# Altium PCB PCB1.PcbDoc
Units mm, origin at the board's own origin, x right, y up, seen from the top; angles counter-clockwise.
Board outline 29.25 x 28 mm, 4 copper layers (L1 (Signal), L2 (GND), L3 (GND), L4 (Signal)), stack 1.57 mm thick; 35 components, 27 nets, 166 pads, 98 vias.
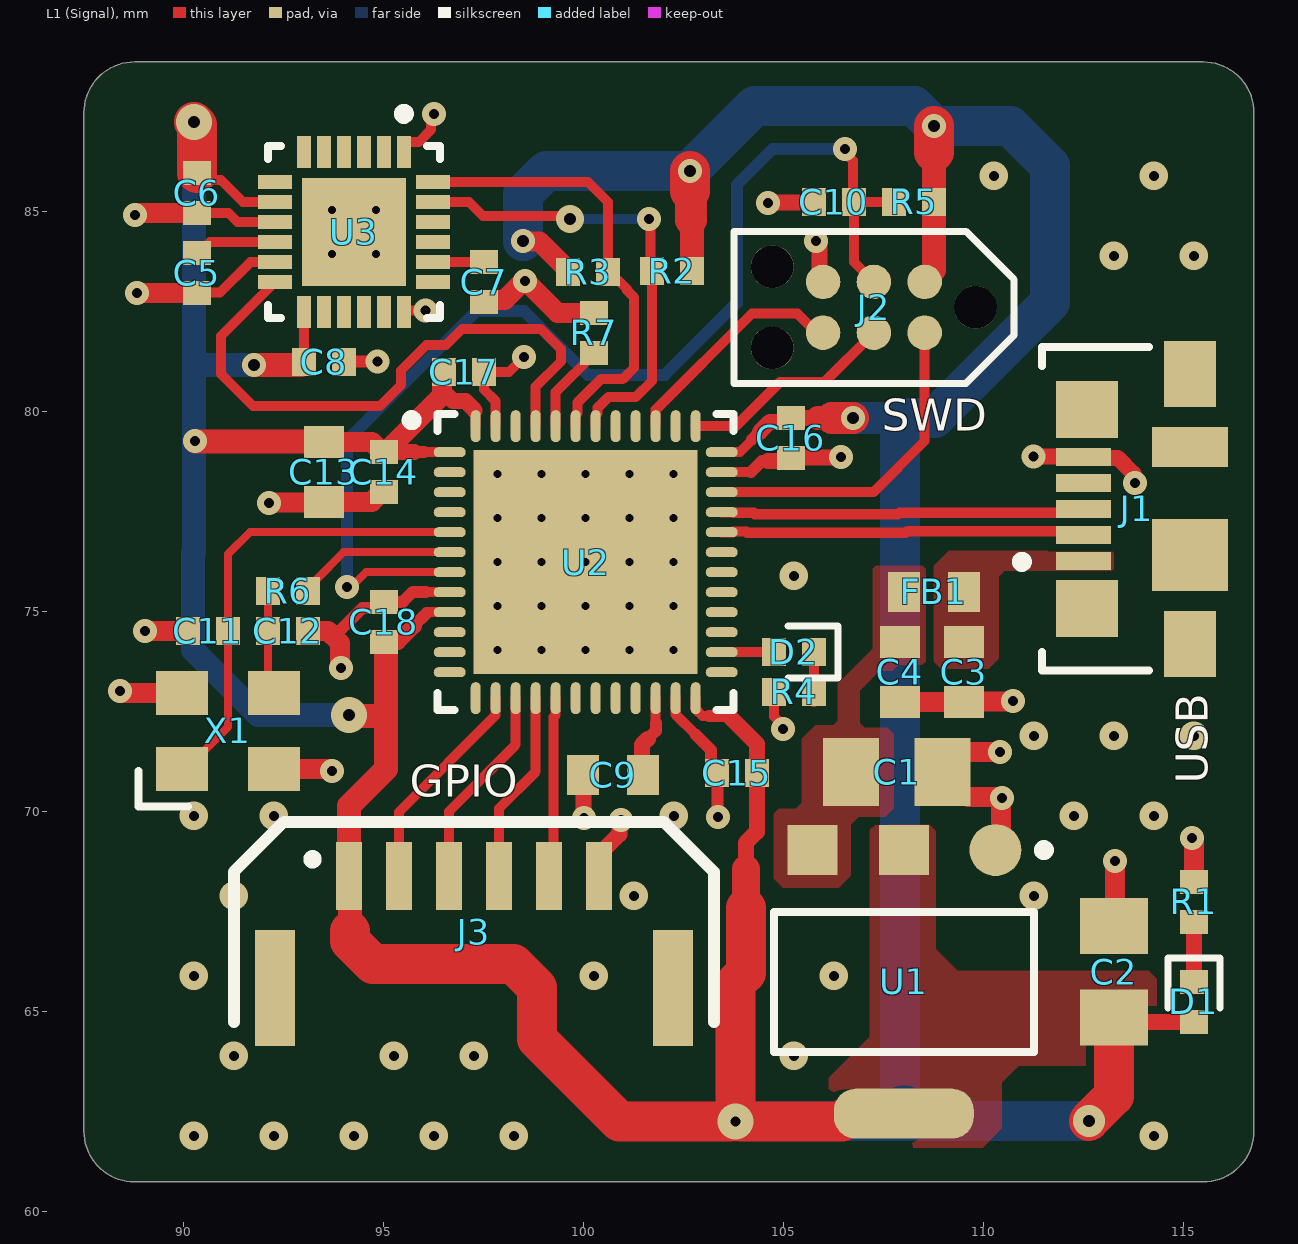
[diagram p0: L1 (Signal) view]
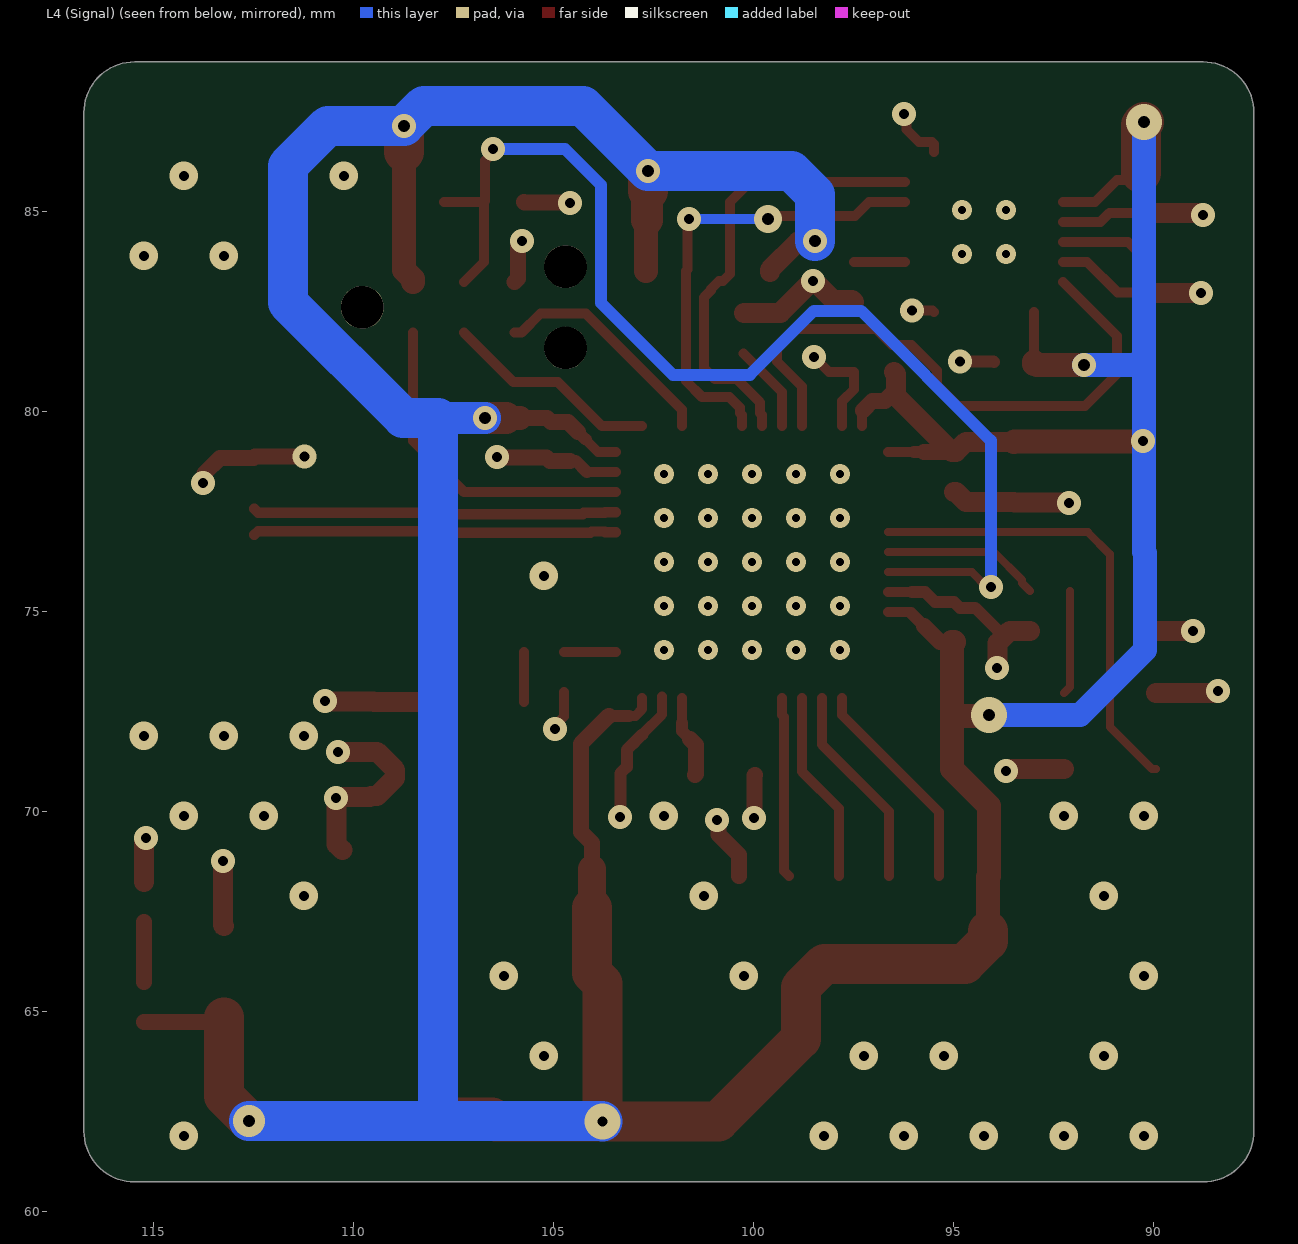
[diagram p1: L4 (Signal) view, seen from below]
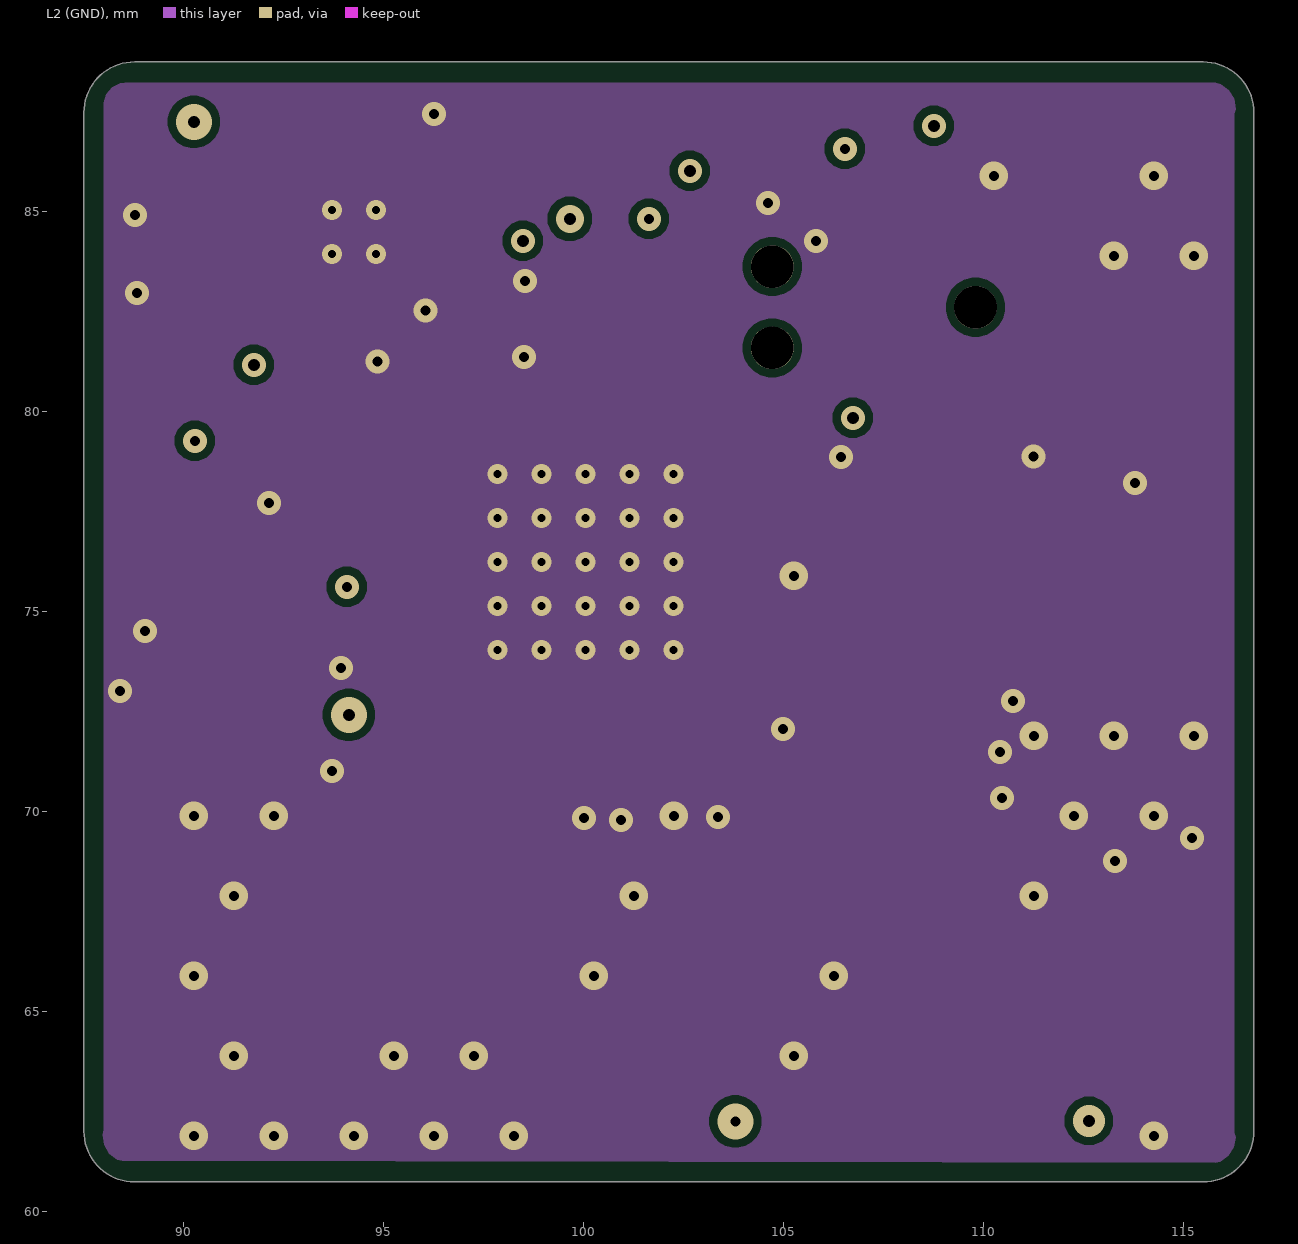
[diagram p2: L2 (GND)]
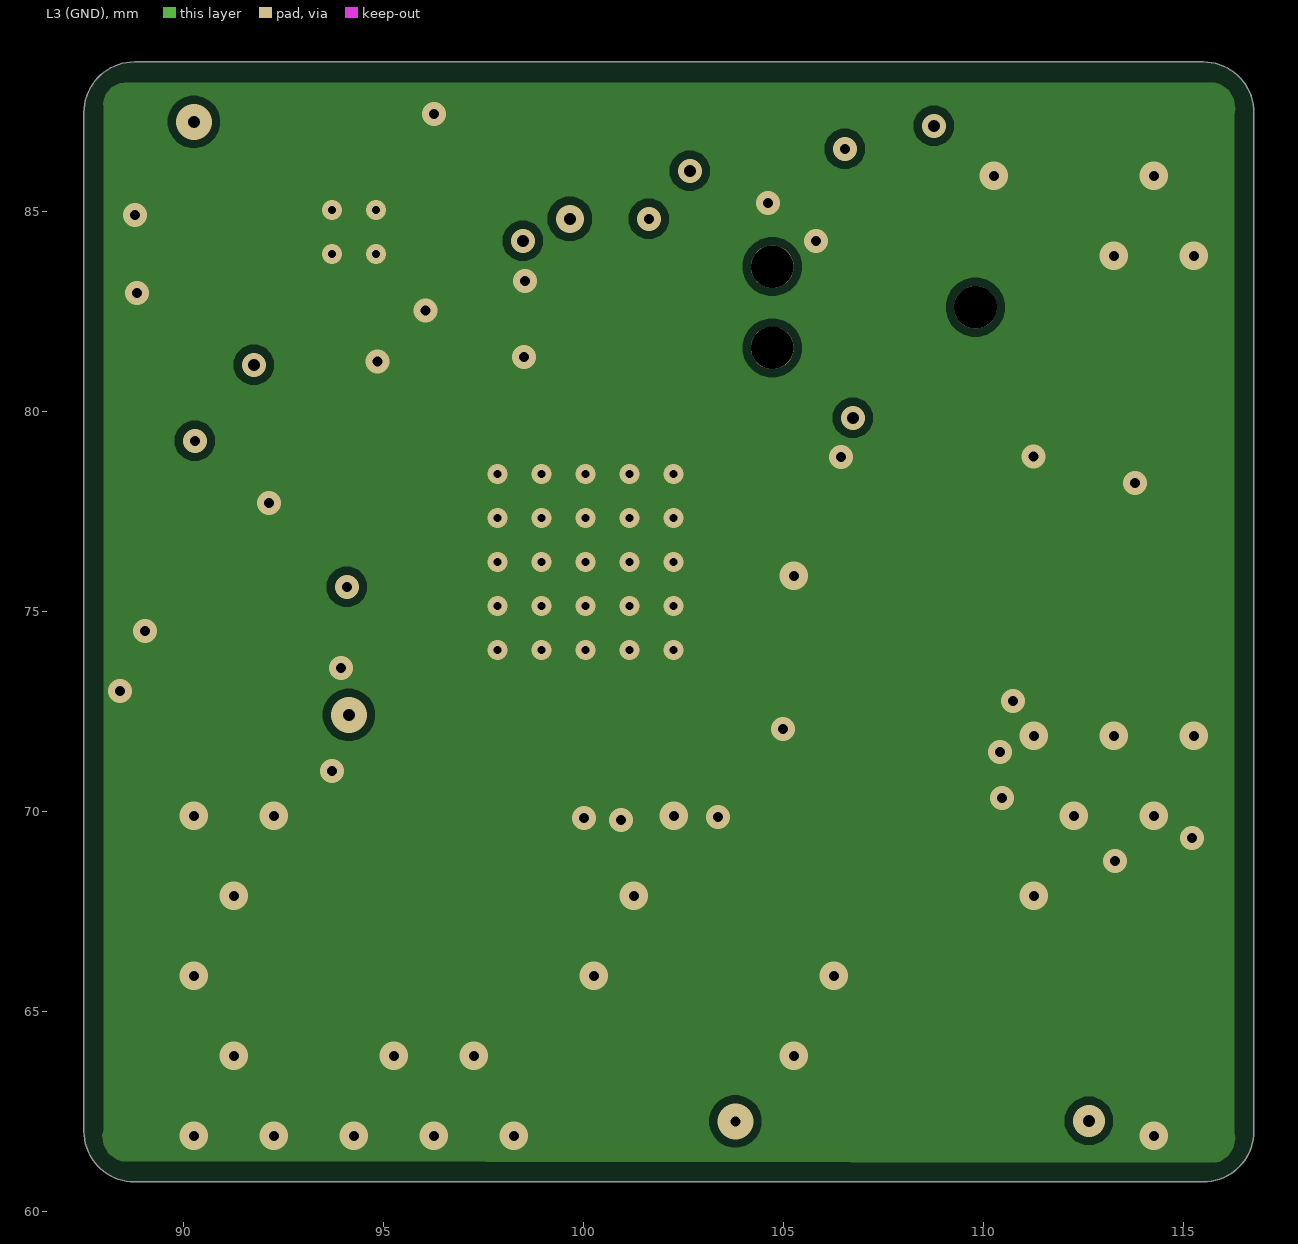
[diagram p3: L3 (GND)]
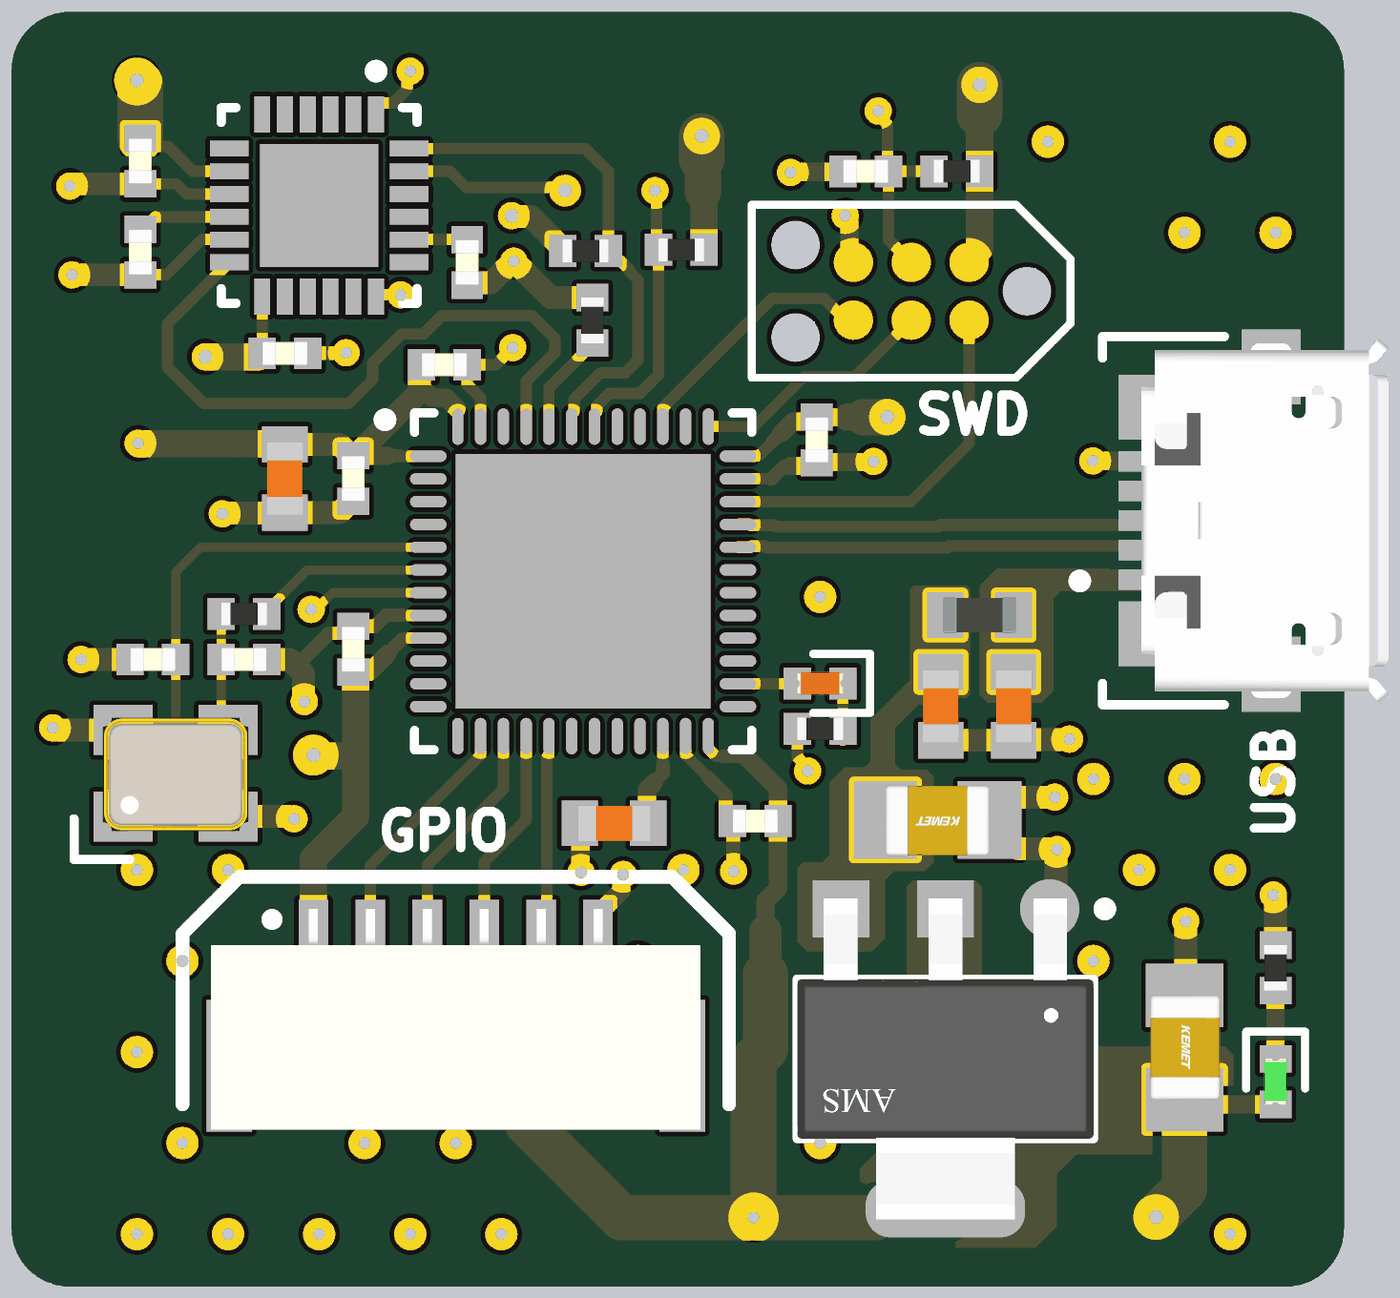
[diagram p4: 3D render of the assembled board from above, using the file's embedded part models]

## Layer stack, top to bottom
Top Solder: solder mask 0.0254, SM-001, Dk 4
L1 (Signal): signal copper 0.035
Dielectric 1: prepreg 0.2, PP-017, Dk 4.6
L2 (GND): signal copper 0.0175
Dielectric 3: core 1.065, Core-039, Dk 4.6
L3 (GND): signal copper 0.0175
Dielectric 5: prepreg 0.2, PP-017, Dk 4.6
L4 (Signal): signal copper 0.035
Bottom Solder: solder mask 0.0254, SM-001, Dk 4

## Board outline
87.5,62.02 ccw(c88.77,62.02) 88.77,60.75 115.48,60.75 ccw(c115.48,62.02) 116.75,62.02 116.75,87.48 ccw(c115.48,87.48) 115.48,88.75 88.77,88.75 ccw(c88.77,87.48) 87.5,87.48

## Design rules (kind name [scope] priority, off if disabled: settings)
Clearance [All] p1: gap=0.2 ignorepadtopadclearanceinfootprint=TRUE
DiffPairsRouting [All] p1: maxlimit=0.254 minlimit=0.203 mostfreqgap=0.254 toplayer_maxgap=0.203 toplayer_prefgap=0.203 toplayer_minwidth=0.26 toplayer_maxwidth=0.26 toplayer_prefwidth=0.26 bottomlayer_maxgap=0.203 bottomlayer_prefgap=0.203 bottomlayer_minwidth=0.26 bottomlayer_maxwidth=0.26 bottomlayer_prefwidth=0.26 impedanceprofiledriven=TRUE impedanceprofileid={C9605FE3-F2DF-4C32-933C-780B4CB2B23F} impedanceprofilevalue=90.000000 maxuncoupledlength=12.7
PolygonConnect [All] p1: connectstyle=Direct reliefconductorwidth=0.254 reliefentries=4 polygonreliefangle="90 Angle" airgapwidth=0.254
RoutingVias [All] p1: holewidth=0.3 width=0.7 viastyle="Through Hole" minholewidth=0.25 minwidth=0.55 maxholewidth=0.4 maxwidth=0.9
SolderMaskExpansion [All] p1: expansion=0.102 istentingtop=FALSE
UnRoutedNet [All] p1: checkbadconnections=TRUE
Width [All] p1: maxlimit=1 minlimit=0.2 preferedwidth=0.3 midlayer1_minwidth=0.254 midlayer1_maxwidth=0.254 midlayer1_prefwidth=0.254 midlayer2_minwidth=0.254 midlayer2_maxwidth=0.254 midlayer2_prefwidth=0.254 minimp=50.000000 maximp=50.000000 favimp=50.000000
28 further rules are at their usual default settings.

## Classes and differential pairs
net class DIFF_USB: USB_D_N USB_D_P
differential pair USB_D: +USB_D_P -USB_D_N

## Components (designator, comment, footprint, x,y, rotation, side; value= is the part's Value field where it differs from the comment)
C1 "22u" CAP_0805 107.825,71 r180 top
C2 "22u" CAP_0805 113.25,66 r270 top
C3 "2.2uF" CAP_0603 109.5,73.5 r90 top
C4 "2.2uF" CAP_0603 107.9,73.5 r90 top
C5 "100nF" CAP_0402 90.325,83.475 r90 top
C6 "10nF" CAP_0402 90.325,85.475 r90 top
C7 "2n2" CAP_0402 97.5,83.25 r90 top
C8 "100nF" CAP_0402 93.5,81.25 r180 top
C9 "2n2" CAP_0603 100.725,70.925 r0 top
C10 "100nF" CAP_0402 106.25,85.25 r0 top
C11 "10pF" CAP_0402 90.6,74.525 r0 top
C12 "10pF" CAP_0402 92.6,74.525 r180 top
C13 "2.2uF" CAP_0603 93.5,78.5 r90 top
C14 "100nF" CAP_0402 95,78.5 r90 top
C15 "100nF" CAP_0402 103.825,70.975 r0 top
C16 "100nF" CAP_0402 105.175,79.35 r90 top
C17 "100nF" CAP_0402 97,81 r180 top
C18 "100nF" CAP_0402 95,74.75 r270 top
D1 "GREEN" LED_0402_GREEN 115.25,65.25 r90 top
D2 "RED" LED_0402_RED 105.25,74 r0 top
FB1 "120R" FB_0603 108.75,75.5 r180 top
J1 "473460001" FP-473460001-MFG 114.8,77.575 r90 top
J2 "TC2030-NL" TC2030-NL-FP 107.25,82.615 r180 top
J3 "SM06B-GHS-TB" SM06B-GHS-TB 97.25,67 r0 top
R1 "1k" RES_0402 115.25,67.75 r270 top
R2 "2k2" RES_0402 102.2,83.525 r0 top
R3 "2k2" RES_0402 100.1,83.5 r180 top
R4 "1k" RES_0402 105.25,73 r0 top
R5 "10K" RES_0402 108.25,85.25 r0 top
R6 "0R" RES_0402 92.6,75.525 r0 top
R7 "10K" RES_0402 100.25,81.975 r270 top
U1 "AMS1117-3.3" FP-AMS1117-IPC_C 108,65.75 r270 top
U2 "STM32F411CEU6" STM-UFQFPN48_L 100.046,76.242 r0 top
U3 "MPU-6050" IS-QFN-24_V 94.25,84.5 r270 top
X1 "24MHz" XTAL_3225 91.1,72.025 r0 top

## Footprints (in the part's own frame and the unit in brackets; to place one, negate y for a bottom-side part, rotate by r counter-clockwise, add the part's x,y. Pads: shape width x height; smd on the part's side, far side on the other; paste and mask are expansions set on the pad)
CAP_0402 [mm]
  rect 0.6x0.7 smd: 1(-0.5,0) 2(0.5,0)
  body extent -0.5,-0.26 0.5,0.26, height 0.37
CAP_0603 [mm]
  rect 0.8x1 smd: 1(-0.75,0) 2(0.75,0)
  body extent -0.8,-0.4 0.8,0.4, height 0.51
CAP_0805 [mm]
  rect 1.4x1.7 smd: 1(-1.143,0) 2(1.143,0)
  body extent -1.15,-0.76 1.15,0.79, height 1.01
FB_0603 [mm]
  rect 0.8x1 smd: 1(-0.75,0) 2(0.75,0)
  body extent -0.8,-0.4 0.8,0.4, height 0.81
FP-473460001-MFG [mm]
  rect 0.45x1.38 smd paste+0 mask+0: 1(-1.3,2.31) 2(-0.65,2.31) 3(0,2.31) 4(0.65,2.31) 5(1.3,2.31)
  rect 1.425x1.55 smd paste+0 mask+0: 6(-2.488,2.225) 7(2.488,2.225)
  rect 1.65x1.3 smd paste+0 mask+0: 8(-3.375,-0.35) 11(3.375,-0.35)
  rect 1.8x1.9 smd paste+0 mask+0: 9(-1.15,-0.35)
  rect 1x1.9 smd paste+0 mask+0: 10(1.55,-0.35)
  silkscreen extent -4.05,0.67 4.05,3.97, body extent -4.3,-2.48 4.3,3.45, height 0.25
FP-AMS1117-IPC_C [mm]
  round 1.3 smd paste+0 mask+0: 1(-3.295,2.29)
  rect 1.25x1.25 smd paste+0 mask+0: 2(-3.295,0) 3(-3.295,-2.29)
  rrect87% 1.25x3.5 smd paste+0 mask+0: 4(3.295,0)
  silkscreen extent -3.42,-3.25 1.75,3.63, body extent -3.9,-3.35 3.9,3.35, height 0.25
IS-QFN-24_V [mm] "QFN, 24-Leads, Body 4x4mm, Pitch 0.5mm, Thermal Pad 2.7x2.6mm"
  rect 0.8x0.35 smd: 1(-2,1.25) 2(-2,0.75) 3(-2,0.25) 4(-2,-0.25) 5(-2,-0.75) 6(-2,-1.25) 13(2,-1.25) 14(2,-0.75) 15(2,-0.25) 16(2,0.25) 17(2,0.75) 18(2,1.25)
  rect 0.35x0.85 smd mask+0.102: 7(-1.25,-1.975) 8(-0.75,-1.975) 9(-0.25,-1.975) 10(0.25,-1.975) 11(0.75,-1.975) 12(1.25,-1.975) 19(1.25,1.975) 20(0.75,1.975) 21(0.25,1.975) 22(-0.25,1.975) 23(-0.75,1.975) 24(-1.25,1.975)
  rect 2.7x2.6 smd: 25(0,0)
  silkscreen extent -3.07,-2.15 2.15,2.15, body extent -2,-2 2,2, height 0.95
LED_0402_GREEN [mm]
  rect 0.6x0.7 smd: A(-0.5,0) K(0.5,0)
  silkscreen extent -0.15,-0.65 1.1,0.65, body extent -0.51,-0.25 0.51,0.25, height 0.45
LED_0402_RED [mm]
  rect 0.6x0.7 smd: A(-0.5,0) K(0.5,0)
  silkscreen extent -0.15,-0.65 1.1,0.65, body extent -0.51,-0.25 0.51,0.25, height 0.45
RES_0402 [mm]
  rect 0.6x0.7 smd: 1(-0.5,0) 2(0.5,0)
  body extent -0.5,-0.25 0.5,0.25, height 0.3
SM06B-GHS-TB [mm]
  rect 0.65x1.7 smd: 1(-3.125,1.4) 2(-1.875,1.4) 3(-0.625,1.4) 4(0.625,1.4) 5(1.875,1.4) 6(3.125,1.4)
  rect 1x2.9 smd: ""(-4.975,-1.4) ""(4.975,-1.4)
  silkscreen extent -6,-2.25 6,2.75, body extent -5.38,-2.8 5.38,2.05, height 4.26
STM-UFQFPN48_L [mm] "QFN, 48-Leads, Body 7.1x7.1mm, Pitch 0.5mm, Thermal Pad 5.6x5.6mm, IPC High Density"
  oval 0.8x0.25 smd: 1(-3.4,2.75) 2(-3.4,2.25) 3(-3.4,1.75) 4(-3.4,1.25) 5(-3.4,0.75) 6(-3.4,0.25) 7(-3.4,-0.25) 8(-3.4,-0.75) 9(-3.4,-1.25) 10(-3.4,-1.75) 11(-3.4,-2.25) 12(-3.4,-2.75) 25(3.4,-2.75) 26(3.4,-2.25) 27(3.4,-1.75) 28(3.4,-1.25) 29(3.4,-0.75) 30(3.4,-0.25) 31(3.4,0.25) 32(3.4,0.75) 33(3.4,1.25) 34(3.4,1.75) 35(3.4,2.25) 36(3.4,2.75)
  oval 0.25x0.8 smd: 13(-2.75,-3.4) 14(-2.25,-3.4) 15(-1.75,-3.4) 16(-1.25,-3.4) 17(-0.75,-3.4) 18(-0.25,-3.4) 19(0.25,-3.4) 20(0.75,-3.4) 21(1.25,-3.4) 22(1.75,-3.4) 23(2.25,-3.4) 24(2.75,-3.4) 37(2.75,3.4) 38(2.25,3.4) 39(1.75,3.4) 40(1.25,3.4) 41(0.75,3.4) 42(0.25,3.4) 43(-0.25,3.4) 44(-0.75,3.4) 45(-1.25,3.4) 46(-1.75,3.4) 47(-2.25,3.4) 48(-2.75,3.4)
  rect 5.6x5.6 smd: 49(0,0)
  silkscreen extent -4.47,-3.7 3.7,3.7, body extent -3.55,-3.55 3.55,3.55, height 0.6
TC2030-NL-FP [mil]
  round 33.98 smd paste-16.99: 1(-50,-25) 2(-50,25) 3(0,-25) 4(0,25) 5(50,-25) 6(50,25)
  round 42.01 hole 42.01 unplated: MH(-100,0) MH(100,-40) MH(100,40)
  silkscreen extent -138,-75 138,75
XTAL_3225 [mm]
  rect 1.3x1.1 smd: 1(-1.15,-0.95) 2(1.15,-0.95) 3(1.15,0.95) 4(-1.15,0.95)
  silkscreen extent -2.23,-1.89 -1,-1, body extent -1.6,-1.28 1.6,1.22, height 0.61

## Part data
C1 C2: library part CAP_0805_16V, "Capacitor SMD 0805 16V"
C3 C4 C9 C13: library part CAP_0603_16V, "Capacitor SMD 0603 16V"
C5 C6 C7 C8 C10 C11 C12 C14 C15 C16 C17 C18: library part CAP_0402_16V, "Capacitor SMD 0402 16V"
D1: library part LED_0402_GREEN, "LED 0402 GREEN SMD"
D2: library part LED_0402_RED, "LED 0402 RED SMD"
FB1: library part FB_0603, "Ferrite Bead SMD 0603"
J1: library part CMP-2000-05246-2, "CONN RCPT USB2.0 MICRO B SMD R/A", Current Rating=1.8A, Manufacturer=Molex, Package=0, Temperature="-30°C to +85°C", Temperature Range High=+85°C, Temperature Range Low=-30°C, Voltage Rating=30V, Automotive=No, Category=Conn, ComponentLink2Description=Datasheet, ComponentLink2URL=https://www.molex.com/webdocs/datasheets/pdf/en-us/0473460001_IO_CONNECTORS.pdf, Conn Orientation="Right Angle", Contact Material=Gold,Nickel, Device Class L1=Connectors, Device Class L2="USB Connectors", Device Class L3=unset, Digikey Description="CONN RCPT USB2.0 MICRO B SMD R/A", Footprint Url=https://www.molex.com/pdm_docs/sd/473460001_sd.pdf, Height=2.945mm, Is Female=yes, Lead Free=Yes, Manufacturer Part Number=473460001, Number Of Contacts=5, Octopart=https://octopart.com/47346-0001-molex-7164928, Pitch=0.65mm, RoHS=TRUE, Shielding=true, Usb Standard="USB 2.0"
J2: "Tag-Connect No-Solder SWD Debug Connector (No Legs) DO NOT PLACE", Manufacturer=Tag-Connect, Manufacturer Part Number=TC2030-NL-FP
J3: "Header Connector 6 Position 1.25MM Pitch SMD Horizontal JST GH", Manufacturer=JST, Manufacturer Part Number=SM06B-GHS-TB
R1 R2 R3 R4 R5 R6 R7: library part RES_0402, "Resistor SMD 0402"
U1: library part CMP-209535-000001-1, "LDO Voltage Regulators 1A, 3.3V", Dropout Voltage=1.1V, Manufacturer="Advanced Monolithic Systems", Max Junction Temp=+125°C, Max Power Dissipation=1.2W, Max Supply Voltage=15V, Nominal Supply Current=5mA, Output Current=1A, Output Voltage=3.3V, Package=AMS1117, Temperature="-40°C to +125°C", Temperature Range Low=-40°C, Automotive=No, Category=IC, ComponentLink2Description=Datasheet, ComponentLink2URL=http://www.advanced-monolithic.com/pdf/ds1117.pdf, Device Class L1="Integrated Circuits (ICs)", Device Class L2="Power Management ICs", Device Class L3="Voltage Regulators - Linear", Height=1.8mm, Ipc Land Pattern Name=SOT229P700X180-4, Lead Free=Yes, Manufacturer Part Number=AMS1117-3.3, Number Of Outputs=1, Octopart=https://octopart.com/ams1117-3.3-advanced+monolithic+systems-25899300, Output Type=Fixed, RoHS=TRUE, Standoff Height=0.64mm, Temperature Range High=+125°C
U2: library part CMP-0243-00165-1, "ARM Cortex-M4 32-bit MCU+FPU, 512 KB Flash, 128 KB RAM, 36 I/Os, 48-Pin UFQFPN, -40 to 85 degC, Tray", I/Os (High Current)=36, Operating Frequency(F) (Processor speed) (MHz)=100, Package Description=UFQFPN48, Package Reference="48-Pin Ultra Thin Fine Pitch Quad Flat No-Lead, 7 x 7 x 0.6 mm Body, 0.5 mm Pitch, Exposed Pad", Supply Voltage(Vcc) min (V)=1.7, ComponentLink1Description="Manufacturer URL", ComponentLink1URL=http://www.st.com/, ComponentLink2Description=Datasheet, ComponentLink2URL=http://www.st.com/st-web-ui/static/active/en/resource/technical/document/datasheet/DM00115249.pdf, Core="ARM Cortex-M4", DatasheetVersion="Rev. 6", FLASH Size (Prog) (kB)=512, Internal RAM Size (kB)=128, Mounting Technology="Surface Mount", Packing=Tray
U3: library part CMP-1753-00002-2, "3-Axis Gyroscope, Accelerometer and a Digital Motion Processor(TM) (DMP), 2.375 to 3.46 V, -40 to 85 degC, 24-Pin QFN, RoHS, Tape and Reel", Manufacturer=InvenSense, Standard Package=5,000, Category=Sensors,Transducers, Datasheet URL=http://datasheet.octopart.com/MPU-6050-InvenSense-datasheet-14421344.pdf, Datasheet Version="Rev. 3.3, 05/2012", Dynamic Catalog=MPU-6000™Series, Family=Multifunction, Featured Product=MPU-60506-Axis,IntegratedI²CSolution, Manufacturer URL=http://www.invensense.com/, Online Catalog=MPU-6000™Series, Other Names="1428-1007-2 / MPU6050", Output Type=Digital, Sensor Type=MotionTracking, Unit PriceUSD=Digital
X1: library part TSX-3225_24.0000MF15X-AC, "Crystal SMD 24MHz 10PPM 7pF 3225", Manufacturer=Epson, Manufacturer Part Number="TSX-3225 24.0000MF15X-AC"

## Via types
v1: diameter 0.711, hole 0.25, L1 (Signal) to L4 (Signal), 29 vias
v2: diameter 0.6, hole 0.25, L1 (Signal) to L4 (Signal), 29 vias
v3: diameter 0.5, hole 0.2, L1 (Signal) to L4 (Signal), 29 vias
v4: diameter 0.6, hole 0.3, L1 (Signal) to L4 (Signal), 5 vias
v5: diameter 0.9, hole 0.3, L1 (Signal) to L4 (Signal), 2 vias
v6: diameter 0.7, hole 0.3, L1 (Signal) to L4 (Signal), 1 vias
v7: diameter 0.6/0.6/0.6/0.6 (per signal layer), hole 0.25, L1 (Signal) to L4 (Signal), 1 vias
v8: diameter 0.9, hole 0.25, L1 (Signal) to L4 (Signal), 1 vias
v9: diameter 0.8, hole 0.3, L1 (Signal) to L4 (Signal), 1 vias

## Nets (pads, with @x,y where several pads share a name; then routed paths per layer and width w, separated by ;. In a path a pad name is that pad's centre, name@x,y a point inside that pad or via, vN(x,y) a via of type N, cw(c..) or ccw(c..) an arc to the next point about the centre after c; other vN are vias at no path point)
+3V3: C2.2 C6.2 C8.2 C13.2 C14.2 C15.2 C16.2 C17.2 C18.2 D1.A J2.1 J3.1 R2.2 R3.2 R5.2 U1.2 U1.4 U2.1 U2.9 U2.24 U2.36 U2.48 U3.8 U3.13 | length 143.7
  L1 (Signal) w0.25: C6.2 90.5,85.8 90.925,85.8 91.475,85.25 U3.8 ; C8.2 U3.13 ; 96,79 96.008,78.992 U2.1 ; 96.067,74.967 96.092,74.992 U2.9 ; U2.48@97.271,80.039 97.296,80.014 U2.48 ; U2.24 102.796,72.567 102.963,72.4 103.125,72.4 ; U2.36 103.842,78.992 103.85,79 103.9,79 104.2,79.3
  L1 (Signal) w0.3: 95.75,74.65 96.067,74.967 ; 95.75,79 96,79 ; 103.125,72.4 103.625,72.4 ; 104.2,79.305 104.395,79.5
  L1 (Signal) w0.4: C14.2 95.75,79 ; C18.2@95.35,74.25 95.75,74.65 ; C17.2 96.5,80.5 96.725,80.275 97.035,80.275 U2.48@97.271,80.039 ; 103.625,72.4 104.325,71.7 C15.2 104.325,69.5 104.05,69.225 104.05,68.572 ; 104.4,79.5 104.65,79.75 105.075,79.75 C16.2 105.85,79.85 ; C2.2 113.357,64.75 D1.A
  L1 (Signal) w0.5: C13.2 94.7,79.25 94.95,79 C14.2 95.05,79 96.45,80.4 96.45,80.95 C17.2 ; v4(98.475,84.275) 98.494,84.256 98.894,84.256 99.6,83.55 R3.2
  L1 (Signal) w0.6: v7(90.275,79.275) 90.288,79.263 93.488,79.263 C13.2 ; v4(91.75,81.175) 92.925,81.175 92.95,81.2 93,81.2 C8.2 ; v5(94.125,72.425) 94.15,72.4 95.05,72.4 ; 94.15,67.025 94.15,68.375 J3.1 94.125,70.15 95.05,71.075 95.05,72.4 ; C18.2 95.05,74.25 95.05,72.4 ; 102.675,84.8 102.7,84.775 R2.2 ; 105.85,79.85 106.2,79.85 ; J2.1 108.52,83.321 108.75,83.551 R5.2 108.75,86.5
  L1 (Signal) w0.7: 104.05,67.6 104.05,68.572
  L1 (Signal) w0.8: 102.65,85.525 102.675,85.5 102.675,84.8 ; 106.2,79.85 v4(106.725,79.85)
  L1 (Signal) w1: v5(90.25,87.25) 90.325,87.175 C6.2 ; 94.15,67.025 94.15,66.775 94.725,66.2 98.239,66.2 98.825,65.614 98.825,64.325 100.887,62.263 v8(103.788,62.263) ; 102.65,85.525 v4(102.65,86.025) ; 104.05,67.6 104.05,65.975 103.788,65.713 v8(103.788,62.263) ; U1.4 107.902,62.357 106.553,62.357 106.458,62.263 v8(103.788,62.263) ; 108.75,86.5 v4(108.75,87.15) ; v9(112.625,62.275) 113.25,62.9 C2.2
  L4 (Signal) w0.6: v5(90.25,87.25) 90.25,81.375 ; v4(91.75,81.175) 90.45,81.175 90.25,81.375 ; v5(94.125,72.425) 91.85,72.425 90.225,74.05 90.225,76.475 90.25,76.5 90.25,81.375
  L4 (Signal) w0.8: v4(106.725,79.85) 107.9,79.85
  L4 (Signal) w1: v4(98.475,84.275) 98.475,85.439 99.061,86.025 v4(102.65,86.025) 104.275,87.65 108.25,87.65 v4(108.75,87.15) 110.65,87.15 111.65,86.15 111.65,82.731 108.769,79.85 107.9,79.85 107.9,62.275 ; v8(103.788,62.263) 103.8,62.275 107.9,62.275 ; v9(112.625,62.275) 107.9,62.275
+5V: C1.2 C4.2 FB1.2 U1.3
GND: C1.1 C2.1 C3.1 C4.1 C5.1 C6.1 C7.1 C8.1 C9.1 C10.1 C11.1 C12.1 C13.1 C14.1 C15.1 C16.1 C17.1 C18.1 J1.5 J2.5 J3.6 R1.1 R4.1 R7.1 U1.1 U2.8 U2.23 U2.35 U2.47 U2.49 U3.1 U3.9 U3.11 U3.18 U3.25 X1.2 X1.4 | length 54.3
  L1 (Signal) w0.25: C5.1 90.332,82.982 90.904,82.982 91.672,83.75 U3.11 ; C6.1 91.114,84.975 91.339,84.75 U3.9 ; U3.18 95.536,82.536 v2(96.044,82.536) ; U3.1 95.5,86.7 95.55,86.75 95.875,86.75 96.183,87.058 96.183,87.383 v2(96.25,87.45) ; 96.05,75.5 96.058,75.492 U2.8 ; U2.47 97.796,80.266 97.5,80.563 C17.1 98.125,81 v2(98.5,81.375) ; U2.23@102.296,72.886 U2.23 102.296,72.43 102.788,71.938 ; U2.35 104.173,78.492 ; R4.1 104.75,72.383 104.975,72.158 v2(104.975,72.075)
  L1 (Signal) w0.3: 93.6,74.525 93.894,74.525 94.469,75.1 94.85,75.1 C18.1 95.475,75.25 95.725,75.5 96.05,75.5 ; C8.1 94.006,81.256 94.837,81.256 v2(94.843,81.262) ; 102.788,71.938 103,71.726 103,71.725 103.175,71.55 103.175,71.125 C15.1 103.337,70.962 103.337,69.888 v2(103.35,69.875) ; 104.173,78.492 104.456,78.775 104.6,78.775
  L1 (Signal) w0.4: C9.1 99.988,70.912 99.988,69.862 v2(100,69.85) ; J3.6 100.375,68.925 100.887,69.437 100.887,69.762 v2(100.925,69.8) ; 104.6,78.775 105.1,78.775 C16.1 105.187,78.862 106.412,78.862 v2(106.425,78.875) ; v2(104.6,85.225) 104.612,85.238 105.738,85.238 C10.1 ; v2(105.8,84.275) 105.8,84.221 105.891,84.129 105.891,83.339 J2.5 ; v2(111.237,78.888) 112.477,78.888 J1.5 112.515,78.85 113.346,78.85 113.737,78.459 113.737,78.263 v2(113.775,78.225)
  L1 (Signal) w0.5: v2(88.4,73.025) 88.427,73.025 88.477,72.975 X1.4 ; v2(88.775,84.925) 88.802,84.925 88.852,84.975 C6.1 ; v2(88.825,82.975) C5.1 ; v2(89.025,74.525) C11.1 ; v2(92.125,77.725) 92.137,77.738 93.487,77.738 C13.1 94.7,77.75 94.95,78 C14.1 ; X1.2 93.623,71.075 93.673,71.025 v2(93.7,71.025) ; C12.1 93.6,74.525 93.906,74.219 93.906,73.619 v2(93.925,73.6) ; C7.1 97.55,82.8 98.023,82.8 98.498,83.275 98.538,83.275 99.338,82.475 R7.1 ; C4.1 C3.1 109.513,72.763 110.713,72.763 v2(110.725,72.775) ; U1.1 110.431,69.186 110.431,70.331 v2(110.45,70.35) 110.431,70.369 109.599,70.369 109.568,70.4 109.418,70.4 108.968,70.85 C1.1 108.968,71.05 109.418,71.5 v2(110.4,71.5) ; C2.1 113.275,67.168 v2(113.275,68.775) ; v2(115.2,69.35) 115.2,69.323 115.25,69.273 R1.1
  other v1: 90.25,61.9 92.25,61.9 94.25,61.9 96.25,61.9 98.25,61.9 114.25,61.9 91.25,63.9 95.25,63.9 97.25,63.9 105.25,63.9 90.25,65.9 100.25,65.9 106.25,65.9 91.25,67.9 101.25,67.9 111.25,67.9 90.25,69.9 92.25,69.9 102.25,69.9 112.25,69.9 114.25,69.9 111.25,71.9 113.25,71.9 115.25,71.9 105.25,75.9 113.25,83.9 115.25,83.9 110.25,85.9 114.25,85.9
  other v2: 98.525,83.275
  other v3: 97.846,74.042 98.946,74.042 100.046,74.042 101.146,74.042 102.246,74.042 97.846,75.142 98.946,75.142 100.046,75.142 101.146,75.142 102.246,75.142 97.846,76.242 98.946,76.242 100.046,76.242 101.146,76.242 102.246,76.242 97.846,77.342 98.946,77.342 100.046,77.342 101.146,77.342 102.246,77.342 97.846,78.442 98.946,78.442 100.046,78.442 101.146,78.442 102.246,78.442 93.7,83.95 94.8,83.95 93.7,85.05 94.8,85.05
IMU_CPOUT: C7.2 U3.20 | length 1.3
  L1 (Signal) w0.25: U3.20 C7.2
IMU_INT: U2.45 U3.12 | length 15.1
  L1 (Signal) w0.25: U3.12 90.925,81.9 90.925,80.95 91.725,80.15 94.9,80.15 95.425,80.675 95.425,81.035 96.065,81.675 96.55,81.675 96.95,82.075 98.925,82.075 99.425,81.575 99.425,81.261 98.796,80.632 U2.45
IMU_REGOUT: C5.2 U3.10 | length 2.1
  L1 (Signal) w0.25: C5.2 90.375,83.975 90.65,84.25 U3.10
IMU_SCL: R2.1 U2.42 U3.23 | length 11.8
  L1 (Signal) w0.25: U3.23 97.125,85.25 97.475,84.9 99.575,84.9 v6(99.65,84.825) ; U2.42 100.296,79.917 100.346,79.967 100.346,80.103 100.61,80.367 101.292,80.367 101.7,80.775 R2.1 101.663,83.562 101.663,84.787 v2(101.625,84.825)
  L4 (Signal) w0.25: v6(99.65,84.825) v2(101.625,84.825)
IMU_SDA: R3.1 U2.43 U3.24 | length 11.4
  L1 (Signal) w0.25: U3.24 100.1,85.75 100.6,85.25 R3.1@100.6,83.55 ; U2.43 99.796,79.917 99.846,79.967 99.846,80.24 100.423,80.817 100.971,80.817 101.25,81.096 101.25,82.865 101.075,83.04 101.075,83.075 100.875,83.275 100.775,83.275 100.6,83.45 R3.1
LED_PWR_K: D1.K R1.2 | length 1.5
  L1 (Signal) w0.4: D1.K R1.2
MCU_BOOT0: R7.2 U2.44 | length 2.2
  L1 (Signal) w0.25: U2.44 99.296,80.496 R7.2@100.262,81.462
MCU_BOOT1: C11.2 U2.5 X1.1 | length 11.7
  L1 (Signal) w0.2: X1.1 90.05,71.075 91.1,72.125 C11.2 91.1,76.447 91.107,76.447 91.652,76.992 U2.5
MCU_LED_A: D2.A U2.26 | length 1.3
  L1 (Signal) w0.25: U2.26 104.742,73.992 D2.A
MCU_LED_K: D2.K R4.2 | length 1.3
  L1 (Signal) w0.25: R4.2@105.75,72.75 D2.K
MCU_NRST: C10.2 J2.3 R5.1 U2.7 | length 29.5
  L1 (Signal) w0.2: v2(94.075,75.625) 94.183,75.625 94.55,75.992 U2.7
  L1 (Signal) w0.25: v2(106.525,86.575) 106.525,86.48 106.725,86.28 106.725,85.275 C10.2 ; J2.3 106.75,83.75 C10.2 ; R5.1 C10.2
  L4 (Signal) w0.3: v2(94.075,75.625) 94.075,79.281 97.319,82.525 98.5,82.525 100.1,80.925 102.025,80.925 103.827,82.727 103.827,85.677 104.725,86.575 v2(106.525,86.575)
MCU_OSC_IN: R6.2 U2.6 | length 4
  L1 (Signal) w0.2: R6.2 93.3,75.725 93.3,75.8 93.992,76.492 U2.6
MCU_PA4: J3.2 U2.14 | length 5.4
  L1 (Signal) w0.25: J3.2 95.375,70 97.796,72.421 U2.14
MCU_PA5: J3.3 U2.15 | length 5.1
  L1 (Signal) w0.25: J3.3 96.625,70.008 98.296,71.679 U2.15
MCU_PA6: J3.4 U2.16 | length 4.8
  L1 (Signal) w0.25: J3.4 97.875,70.083 98.796,71.004 U2.16
MCU_PA7: J3.5 U2.17 | length 4.5
  L1 (Signal) w0.25: J3.5 99.246,68.521 99.246,72.371 99.296,72.421 U2.17
MCU_SWCLK: J2.4 U2.37 | length 5.4
  L1 (Signal) w0.25: U2.37 103.799,79.642 104.898,80.741 106.011,80.741 J2.4
MCU_SWDIO: J2.2 U2.34 | length 8.3
  L1 (Signal) w0.25: U2.34 107.242,77.992 108.519,79.269 J2.2@108.519,81.979
MCU_SWO: J2.6 U2.39 | length 5.8
  L1 (Signal) w0.25: U2.39 101.796,80.053 104.2,82.458 105.337,82.458 105.814,81.98 J2.6
MCU_VCAP1: C9.2 U2.22 | length 2.1
  L1 (Signal) w0.25: U2.22 101.796,72.229 101.8,72.225
  L1 (Signal) w0.3: 101.6,71.825 101.8,72.025 101.8,72.225
  L1 (Signal) w0.4: C9.2 101.45,70.95 101.45,71.675 101.6,71.825
USB_D_N: J1.2 U2.32 | length 9.1
  L1 (Signal) w0.26: U2.32 103.711,76.992 103.729,77.01 104.056,77.01 104.085,76.982 108.046,76.982 108.083,77.018 112.397,77.018 J1.2
USB_D_P: J1.3 U2.33 | length 9.1
  L1 (Signal) w0.26: U2.33 103.711,77.492 103.729,77.473 104.248,77.473 104.277,77.445 107.854,77.445 107.891,77.482 112.397,77.482 J1.3
VBUS: C3.2 FB1.1 J1.1
XTAL_IN: C12.2 R6.1 X1.3 | length 2.6
  L1 (Signal) w0.2: R6.1 92.1,73.125 X1.3
pads on no net: J1.4 J1.6 J1.7 J1.8 J1.9 J1.10 J1.11 J2.MH J3. U2.2 U2.3 U2.4 U2.10 U2.11 U2.12 U2.13 U2.18 U2.19 U2.20 U2.21 U2.25 U2.27 U2.28 U2.29 U2.30 U2.31 U2.38 U2.40 U2.41 U2.46 U3.2 U3.3 U3.4 U3.5 U3.6 U3.7 U3.14 U3.15 U3.16 U3.17 U3.19 U3.21 U3.22

## Polygon pours and split planes (outlines as drawn)
+3V3 on L1 (Signal) "+3V3_L01_P002" (solid, pour order 2): 106.3,61.7 106.375,61.6 109.975,61.6 110.45,62.075 110.45,63.225 110.875,63.65 114.15,63.65 114.325,63.825 114.325,65.825 114.125,66.025 109.35,66.025 108.8,66.575 108.8,69.525 108.65,69.675 108.45,69.675 107.275,69.675 107.15,69.55 107.15,64.375 106.125,63.35 106.125,61.9 106.225,61.8
+5V on L1 (Signal) "+5V_L01_P001" (solid, pour order 1): 107.225,74.075 106.35,73.2 106.35,72.275 106.235,72.16 105.785,72.16 105.45,71.825 105.45,70.225 105.3,70.075 104.875,70.075 104.75,69.95 104.75,68.325 104.975,68.1 106.375,68.1 106.675,68.4 106.675,69.675 106.875,69.875 107.55,69.875 107.75,70.075 107.75,71.95 107.6,72.1 107.025,72.1 106.9,72.225 106.9,73.025 107.4,73.525 107.725,73.525 107.875,73.675 108.475,73.675 108.55,73.75 108.55,76.075 108.475,76.15 107.3,76.15 107.225,76.075
VBUS on L1 (Signal) "VBUS_L01_P000" (solid, pour order 0): 109.125,76.525 108.75,76.15 108.75,73.75 108.925,73.575 110.125,73.575 110.375,73.825 110.375,75.875 110.525,76.025 113.2,76.025 113.25,76.075 113.25,76.475 113.2,76.525 112.525,76.525
GND on L2 (GND) "GND_L02_P003" (solid, pour order 3): 88,87.617 cw(c88.564,87.663) 88.518,88.227 115.795,88.227 cw(c115.641,87.604) 116.264,87.447 116.264,61.982 cw(c115.651,61.845) 115.787,61.232 88.459,61.275 cw(c88.617,61.892) 88,62.051
GND on L3 (GND) "GND_L03_P004" (solid, pour order 4): 87.992,87.613 cw(c88.556,87.659) 88.51,88.223 115.787,88.223 cw(c115.634,87.599) 116.256,87.443 116.256,61.977 cw(c115.643,61.841) 115.779,61.227 88.452,61.271 cw(c88.609,61.888) 87.992,62.047

## Silkscreen, mask and mechanical layers (free items; w line width, h text height)
Top Overlay:
  text "SWD" at 107.453,79.523 h0.8
  text "USB" at 115.596,70.709 h0.8 r90
  text "GPIO" at 95.65,70.379 h0.8
Mechanical 1:
  lines w0.254: 87.5,87.48 cw(c88.77,87.48) 88.77,88.75 115.48,88.75 cw(c115.48,87.48) 116.75,87.48 116.75,62.02 cw(c115.48,62.02) 115.48,60.75 88.77,60.75 cw(c88.77,62.02) 87.5,62.02 87.5,87.5

## Text inside footprints (layer, text, board x,y; h text height)
D1: Mechanical 13 "+" at 114.742,63.367 h0.5 r90
D2: Mechanical 13 "+" at 103.367,74.508 h0.5